# EAGLE board Digital Temperature Sensor Breakout - TMP102-Panel (EAGLE 6.4), part 1 of 3
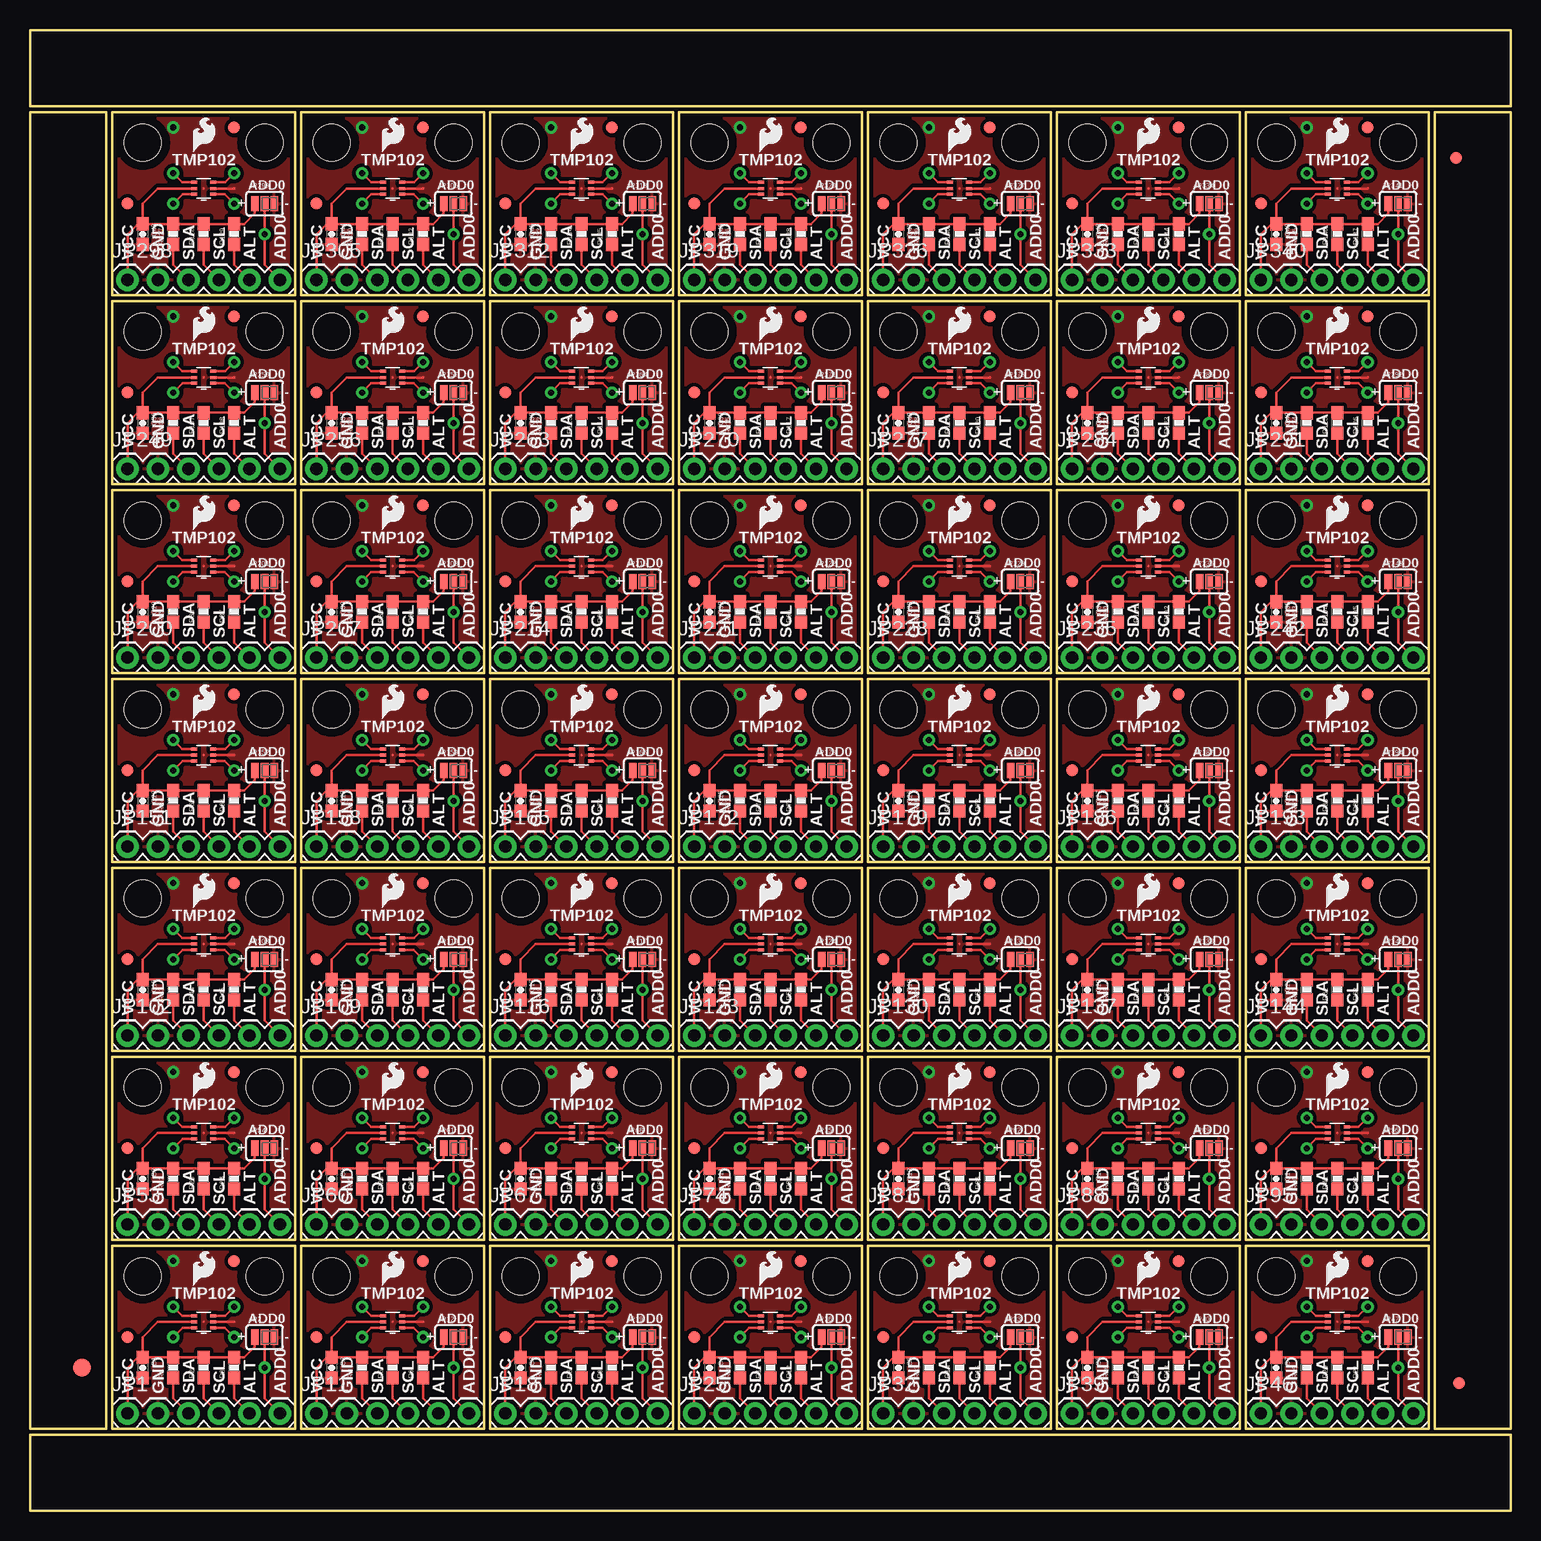
[diagram p0: board, top side]
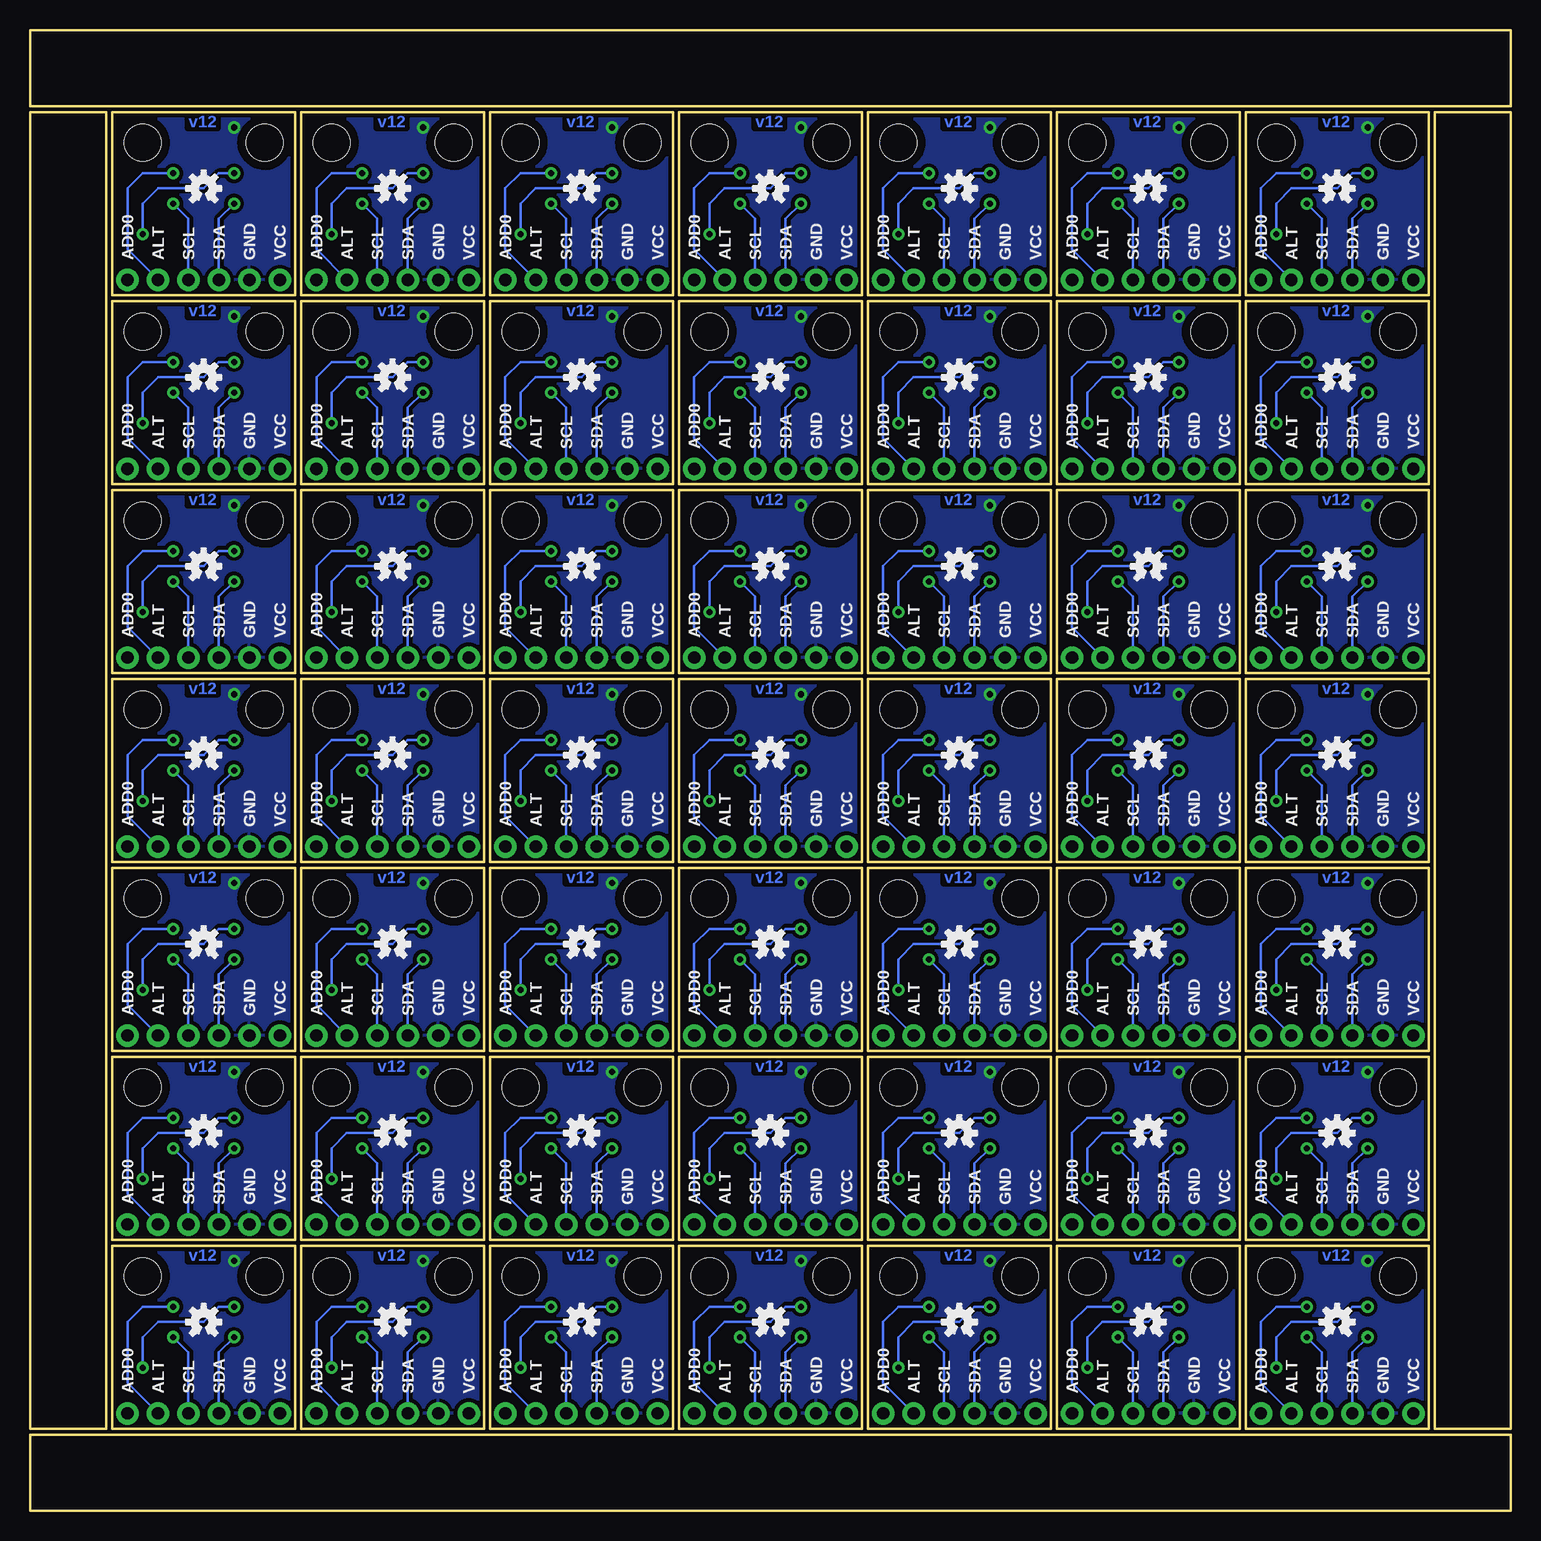
[diagram p1: board, bottom side, seen from below]

Size 123.44 x 123.44 mm. Coordinates in mm from the lower left corner, seen from the top.
Outline: 216 segments
Copper layers (1*16): Top 0.035mm / dielectric 1.5mm / Bottom 0.035mm
Design rules "SparkFun": minimum track width 7mil, minimum drill 15mil, track to track 8mil, track to pad 8mil, pad to pad 8mil, via to via 8mil, smd to smd 8mil, copper to edge 8mil, drill to drill 8mil, minimum pad ring 12mil, minimum via ring 10mil, stop-mask expansion 4mil, vias tented up to drill 20mil, thermal gap 10mil

## Footprints (pad centres in the part's own frame; a part is rotated, then mirrored left to right if it is on the bottom)
0603-CAP = smd 1.1 x 1: 1 -0.85,0; 2 0.85,0
FIDUCIAL-1.5X3 = smd 1.5 x 1.5: 1 0,0
FIDUCIAL-1X2 = smd 1 x 1: 1 0,0
1X06 = drill 1.016 pad 1.88: 1 0,0; 2 2.54,0; 3 5.08,0; 4 7.62,0; 5 10.16,0; 6 12.7,0
SJ_3_PASTE2&3 = smd 0.635 x 1.27: 1 -0.813,0; 2 0,0; 3 0.813,0
STAND-OFF-TIGHT = hole 3.048: 0,0
0603-RES = smd 1.1 x 1: 1 -0.85,0; 2 0.85,0
SOT563-2 = smd 0.508 x 0.249: 1 -0.8,0.498; 2 -0.8,0.003; 3 -0.8,-0.506; 4 0.776,-0.506; 5 0.776,0.003; 6 0.776,0.498

## Placement (x,y rotation side)
C1  0.1uF  [0603-CAP]  9.4,11.94 270 top
C2  0.1uF  [0603-CAP]  25.15,11.94 270 top
C3  0.1uF  [0603-CAP]  40.89,11.94 270 top
C4  0.1uF  [0603-CAP]  56.64,11.94 270 top
C5  0.1uF  [0603-CAP]  72.39,11.94 270 top
C6  0.1uF  [0603-CAP]  88.14,11.94 270 top
C7  0.1uF  [0603-CAP]  103.89,11.94 270 top
C8  0.1uF  [0603-CAP]  9.4,27.69 270 top
C9  0.1uF  [0603-CAP]  25.15,27.69 270 top
C10  0.1uF  [0603-CAP]  40.89,27.69 270 top
C11  0.1uF  [0603-CAP]  56.64,27.69 270 top
C12  0.1uF  [0603-CAP]  72.39,27.69 270 top
C13  0.1uF  [0603-CAP]  88.14,27.69 270 top
C14  0.1uF  [0603-CAP]  103.89,27.69 270 top
C15  0.1uF  [0603-CAP]  9.4,43.43 270 top
C16  0.1uF  [0603-CAP]  25.15,43.43 270 top
C17  0.1uF  [0603-CAP]  40.89,43.43 270 top
C18  0.1uF  [0603-CAP]  56.64,43.43 270 top
C19  0.1uF  [0603-CAP]  72.39,43.43 270 top
C20  0.1uF  [0603-CAP]  88.14,43.43 270 top
C21  0.1uF  [0603-CAP]  103.89,43.43 270 top
C22  0.1uF  [0603-CAP]  9.4,59.18 270 top
C23  0.1uF  [0603-CAP]  25.15,59.18 270 top
C24  0.1uF  [0603-CAP]  40.89,59.18 270 top
C25  0.1uF  [0603-CAP]  56.64,59.18 270 top
C26  0.1uF  [0603-CAP]  72.39,59.18 270 top
C27  0.1uF  [0603-CAP]  88.14,59.18 270 top
C28  0.1uF  [0603-CAP]  103.89,59.18 270 top
C29  0.1uF  [0603-CAP]  9.4,74.93 270 top
C30  0.1uF  [0603-CAP]  25.15,74.93 270 top
C31  0.1uF  [0603-CAP]  40.89,74.93 270 top
C32  0.1uF  [0603-CAP]  56.64,74.93 270 top
C33  0.1uF  [0603-CAP]  72.39,74.93 270 top
C34  0.1uF  [0603-CAP]  88.14,74.93 270 top
C35  0.1uF  [0603-CAP]  103.89,74.93 270 top
C36  0.1uF  [0603-CAP]  9.4,90.68 270 top
C37  0.1uF  [0603-CAP]  25.15,90.68 270 top
C38  0.1uF  [0603-CAP]  40.89,90.68 270 top
C39  0.1uF  [0603-CAP]  56.64,90.68 270 top
C40  0.1uF  [0603-CAP]  72.39,90.68 270 top
C41  0.1uF  [0603-CAP]  88.14,90.68 270 top
C42  0.1uF  [0603-CAP]  103.89,90.68 270 top
C43  0.1uF  [0603-CAP]  9.4,106.43 270 top
C44  0.1uF  [0603-CAP]  25.15,106.43 270 top
C45  0.1uF  [0603-CAP]  40.89,106.43 270 top
C46  0.1uF  [0603-CAP]  56.64,106.43 270 top
C47  0.1uF  [0603-CAP]  72.39,106.43 270 top
C48  0.1uF  [0603-CAP]  88.14,106.43 270 top
C49  0.1uF  [0603-CAP]  103.89,106.43 270 top
E$1  [FIDUCIAL-1.5X3]  4.32,11.94 0 top
E$4  [FIDUCIAL-1X2]  119.13,10.67 0 top
E$5  [FIDUCIAL-1X2]  118.87,112.78 180 top
JP1  [1X06]  8.13,8.13 0 top
JP2  JUMPER-32-3  [SJ_3_PASTE2&3]  19.56,14.48 0 top
JP3  LOGO-SFESK  [SFE-LOGO-FLAME]  13.59,18.8 0 top
JP4  FIDUCIAL1X2  [FIDUCIAL-1X2]  8.13,14.48 0 top
JP5  FIDUCIAL1X2  [FIDUCIAL-1X2]  17.02,20.83 0 top
JP6  STAND-OFFTIGHT  [STAND-OFF-TIGHT]  9.4,19.56 0 top
JP7  STAND-OFFTIGHT  [STAND-OFF-TIGHT]  19.56,19.56 0 top
JP8  LOGO-SFESK  [SFE-LOGO-FLAME]  29.34,18.8 0 top
JP9  FIDUCIAL1X2  [FIDUCIAL-1X2]  23.88,14.48 0 top
JP10  FIDUCIAL1X2  [FIDUCIAL-1X2]  32.77,20.83 0 top
JP11  [1X06]  23.88,8.13 0 top
JP12  JUMPER-32-3  [SJ_3_PASTE2&3]  35.31,14.48 0 top
JP13  STAND-OFFTIGHT  [STAND-OFF-TIGHT]  25.15,19.56 0 top
JP14  STAND-OFFTIGHT  [STAND-OFF-TIGHT]  35.31,19.56 0 top
JP15  LOGO-SFESK  [SFE-LOGO-FLAME]  45.09,18.8 0 top
JP16  FIDUCIAL1X2  [FIDUCIAL-1X2]  39.62,14.48 0 top
JP17  FIDUCIAL1X2  [FIDUCIAL-1X2]  48.51,20.83 0 top
JP18  [1X06]  39.62,8.13 0 top
JP19  JUMPER-32-3  [SJ_3_PASTE2&3]  51.05,14.48 0 top
JP20  STAND-OFFTIGHT  [STAND-OFF-TIGHT]  40.89,19.56 0 top
JP21  STAND-OFFTIGHT  [STAND-OFF-TIGHT]  51.05,19.56 0 top
JP22  LOGO-SFESK  [SFE-LOGO-FLAME]  60.83,18.8 0 top
JP23  FIDUCIAL1X2  [FIDUCIAL-1X2]  55.37,14.48 0 top
JP24  FIDUCIAL1X2  [FIDUCIAL-1X2]  64.26,20.83 0 top
JP25  [1X06]  55.37,8.13 0 top
JP26  JUMPER-32-3  [SJ_3_PASTE2&3]  66.8,14.48 0 top
JP27  STAND-OFFTIGHT  [STAND-OFF-TIGHT]  56.64,19.56 0 top
JP28  STAND-OFFTIGHT  [STAND-OFF-TIGHT]  66.8,19.56 0 top
JP29  LOGO-SFESK  [SFE-LOGO-FLAME]  76.58,18.8 0 top
JP30  FIDUCIAL1X2  [FIDUCIAL-1X2]  71.12,14.48 0 top
JP31  FIDUCIAL1X2  [FIDUCIAL-1X2]  80.01,20.83 0 top
JP32  [1X06]  71.12,8.13 0 top
JP33  JUMPER-32-3  [SJ_3_PASTE2&3]  82.55,14.48 0 top
JP34  STAND-OFFTIGHT  [STAND-OFF-TIGHT]  72.39,19.56 0 top
JP35  STAND-OFFTIGHT  [STAND-OFF-TIGHT]  82.55,19.56 0 top
JP36  LOGO-SFESK  [SFE-LOGO-FLAME]  92.33,18.8 0 top
JP37  FIDUCIAL1X2  [FIDUCIAL-1X2]  86.87,14.48 0 top
JP38  FIDUCIAL1X2  [FIDUCIAL-1X2]  95.76,20.83 0 top
JP39  [1X06]  86.87,8.13 0 top
JP40  JUMPER-32-3  [SJ_3_PASTE2&3]  98.3,14.48 0 top
JP41  STAND-OFFTIGHT  [STAND-OFF-TIGHT]  88.14,19.56 0 top
JP42  STAND-OFFTIGHT  [STAND-OFF-TIGHT]  98.3,19.56 0 top
JP43  LOGO-SFESK  [SFE-LOGO-FLAME]  108.08,18.8 0 top
JP44  FIDUCIAL1X2  [FIDUCIAL-1X2]  102.62,14.48 0 top
JP45  FIDUCIAL1X2  [FIDUCIAL-1X2]  111.51,20.83 0 top
JP46  [1X06]  102.62,8.13 0 top
JP47  JUMPER-32-3  [SJ_3_PASTE2&3]  114.05,14.48 0 top
JP48  STAND-OFFTIGHT  [STAND-OFF-TIGHT]  103.89,19.56 0 top
JP49  STAND-OFFTIGHT  [STAND-OFF-TIGHT]  114.05,19.56 0 top
JP50  LOGO-SFESK  [SFE-LOGO-FLAME]  13.59,34.54 0 top
JP51  FIDUCIAL1X2  [FIDUCIAL-1X2]  8.13,30.23 0 top
JP52  FIDUCIAL1X2  [FIDUCIAL-1X2]  17.02,36.58 0 top
JP53  [1X06]  8.13,23.88 0 top
JP54  JUMPER-32-3  [SJ_3_PASTE2&3]  19.56,30.23 0 top
JP55  STAND-OFFTIGHT  [STAND-OFF-TIGHT]  9.4,35.31 0 top
JP56  STAND-OFFTIGHT  [STAND-OFF-TIGHT]  19.56,35.31 0 top
JP57  LOGO-SFESK  [SFE-LOGO-FLAME]  29.34,34.54 0 top
JP58  FIDUCIAL1X2  [FIDUCIAL-1X2]  23.88,30.23 0 top
JP59  FIDUCIAL1X2  [FIDUCIAL-1X2]  32.77,36.58 0 top
JP60  [1X06]  23.88,23.88 0 top
JP61  JUMPER-32-3  [SJ_3_PASTE2&3]  35.31,30.23 0 top
JP62  STAND-OFFTIGHT  [STAND-OFF-TIGHT]  25.15,35.31 0 top
JP63  STAND-OFFTIGHT  [STAND-OFF-TIGHT]  35.31,35.31 0 top
JP64  LOGO-SFESK  [SFE-LOGO-FLAME]  45.09,34.54 0 top
JP65  FIDUCIAL1X2  [FIDUCIAL-1X2]  39.62,30.23 0 top
JP66  FIDUCIAL1X2  [FIDUCIAL-1X2]  48.51,36.58 0 top
JP67  [1X06]  39.62,23.88 0 top
JP68  JUMPER-32-3  [SJ_3_PASTE2&3]  51.05,30.23 0 top
JP69  STAND-OFFTIGHT  [STAND-OFF-TIGHT]  40.89,35.31 0 top
JP70  STAND-OFFTIGHT  [STAND-OFF-TIGHT]  51.05,35.31 0 top
JP71  LOGO-SFESK  [SFE-LOGO-FLAME]  60.83,34.54 0 top
JP72  FIDUCIAL1X2  [FIDUCIAL-1X2]  55.37,30.23 0 top
JP73  FIDUCIAL1X2  [FIDUCIAL-1X2]  64.26,36.58 0 top
JP74  [1X06]  55.37,23.88 0 top
JP75  JUMPER-32-3  [SJ_3_PASTE2&3]  66.8,30.23 0 top
JP76  STAND-OFFTIGHT  [STAND-OFF-TIGHT]  56.64,35.31 0 top
JP77  STAND-OFFTIGHT  [STAND-OFF-TIGHT]  66.8,35.31 0 top
JP78  LOGO-SFESK  [SFE-LOGO-FLAME]  76.58,34.54 0 top
JP79  FIDUCIAL1X2  [FIDUCIAL-1X2]  71.12,30.23 0 top
JP80  FIDUCIAL1X2  [FIDUCIAL-1X2]  80.01,36.58 0 top
JP81  [1X06]  71.12,23.88 0 top
JP82  JUMPER-32-3  [SJ_3_PASTE2&3]  82.55,30.23 0 top
JP83  STAND-OFFTIGHT  [STAND-OFF-TIGHT]  72.39,35.31 0 top
JP84  STAND-OFFTIGHT  [STAND-OFF-TIGHT]  82.55,35.31 0 top
JP85  LOGO-SFESK  [SFE-LOGO-FLAME]  92.33,34.54 0 top
JP86  FIDUCIAL1X2  [FIDUCIAL-1X2]  86.87,30.23 0 top
JP87  FIDUCIAL1X2  [FIDUCIAL-1X2]  95.76,36.58 0 top
JP88  [1X06]  86.87,23.88 0 top
JP89  JUMPER-32-3  [SJ_3_PASTE2&3]  98.3,30.23 0 top
JP90  STAND-OFFTIGHT  [STAND-OFF-TIGHT]  88.14,35.31 0 top
JP91  STAND-OFFTIGHT  [STAND-OFF-TIGHT]  98.3,35.31 0 top
JP92  LOGO-SFESK  [SFE-LOGO-FLAME]  108.08,34.54 0 top
JP93  FIDUCIAL1X2  [FIDUCIAL-1X2]  102.62,30.23 0 top
JP94  FIDUCIAL1X2  [FIDUCIAL-1X2]  111.51,36.58 0 top
JP95  [1X06]  102.62,23.88 0 top
JP96  JUMPER-32-3  [SJ_3_PASTE2&3]  114.05,30.23 0 top
JP97  STAND-OFFTIGHT  [STAND-OFF-TIGHT]  103.89,35.31 0 top
JP98  STAND-OFFTIGHT  [STAND-OFF-TIGHT]  114.05,35.31 0 top
JP99  LOGO-SFESK  [SFE-LOGO-FLAME]  13.59,50.29 0 top
JP100  FIDUCIAL1X2  [FIDUCIAL-1X2]  8.13,45.97 0 top
JP101  FIDUCIAL1X2  [FIDUCIAL-1X2]  17.02,52.32 0 top
JP102  [1X06]  8.13,39.62 0 top
JP103  JUMPER-32-3  [SJ_3_PASTE2&3]  19.56,45.97 0 top
JP104  STAND-OFFTIGHT  [STAND-OFF-TIGHT]  9.4,51.05 0 top
JP105  STAND-OFFTIGHT  [STAND-OFF-TIGHT]  19.56,51.05 0 top
JP106  LOGO-SFESK  [SFE-LOGO-FLAME]  29.34,50.29 0 top
JP107  FIDUCIAL1X2  [FIDUCIAL-1X2]  23.88,45.97 0 top
JP108  FIDUCIAL1X2  [FIDUCIAL-1X2]  32.77,52.32 0 top
JP109  [1X06]  23.88,39.62 0 top
JP110  JUMPER-32-3  [SJ_3_PASTE2&3]  35.31,45.97 0 top
JP111  STAND-OFFTIGHT  [STAND-OFF-TIGHT]  25.15,51.05 0 top
JP112  STAND-OFFTIGHT  [STAND-OFF-TIGHT]  35.31,51.05 0 top
JP113  LOGO-SFESK  [SFE-LOGO-FLAME]  45.09,50.29 0 top
JP114  FIDUCIAL1X2  [FIDUCIAL-1X2]  39.62,45.97 0 top
JP115  FIDUCIAL1X2  [FIDUCIAL-1X2]  48.51,52.32 0 top
JP116  [1X06]  39.62,39.62 0 top
JP117  JUMPER-32-3  [SJ_3_PASTE2&3]  51.05,45.97 0 top
JP118  STAND-OFFTIGHT  [STAND-OFF-TIGHT]  40.89,51.05 0 top
JP119  STAND-OFFTIGHT  [STAND-OFF-TIGHT]  51.05,51.05 0 top
JP120  LOGO-SFESK  [SFE-LOGO-FLAME]  60.83,50.29 0 top
JP121  FIDUCIAL1X2  [FIDUCIAL-1X2]  55.37,45.97 0 top
JP122  FIDUCIAL1X2  [FIDUCIAL-1X2]  64.26,52.32 0 top
JP123  [1X06]  55.37,39.62 0 top
JP124  JUMPER-32-3  [SJ_3_PASTE2&3]  66.8,45.97 0 top
JP125  STAND-OFFTIGHT  [STAND-OFF-TIGHT]  56.64,51.05 0 top
JP126  STAND-OFFTIGHT  [STAND-OFF-TIGHT]  66.8,51.05 0 top
JP127  LOGO-SFESK  [SFE-LOGO-FLAME]  76.58,50.29 0 top
JP128  FIDUCIAL1X2  [FIDUCIAL-1X2]  71.12,45.97 0 top
JP129  FIDUCIAL1X2  [FIDUCIAL-1X2]  80.01,52.32 0 top
JP130  [1X06]  71.12,39.62 0 top
JP131  JUMPER-32-3  [SJ_3_PASTE2&3]  82.55,45.97 0 top
JP132  STAND-OFFTIGHT  [STAND-OFF-TIGHT]  72.39,51.05 0 top
JP133  STAND-OFFTIGHT  [STAND-OFF-TIGHT]  82.55,51.05 0 top
JP134  LOGO-SFESK  [SFE-LOGO-FLAME]  92.33,50.29 0 top
JP135  FIDUCIAL1X2  [FIDUCIAL-1X2]  86.87,45.97 0 top
JP136  FIDUCIAL1X2  [FIDUCIAL-1X2]  95.76,52.32 0 top
JP137  [1X06]  86.87,39.62 0 top
JP138  JUMPER-32-3  [SJ_3_PASTE2&3]  98.3,45.97 0 top
JP139  STAND-OFFTIGHT  [STAND-OFF-TIGHT]  88.14,51.05 0 top
JP140  STAND-OFFTIGHT  [STAND-OFF-TIGHT]  98.3,51.05 0 top
JP141  LOGO-SFESK  [SFE-LOGO-FLAME]  108.08,50.29 0 top
JP142  FIDUCIAL1X2  [FIDUCIAL-1X2]  102.62,45.97 0 top
JP143  FIDUCIAL1X2  [FIDUCIAL-1X2]  111.51,52.32 0 top
JP144  [1X06]  102.62,39.62 0 top
JP145  JUMPER-32-3  [SJ_3_PASTE2&3]  114.05,45.97 0 top
JP146  STAND-OFFTIGHT  [STAND-OFF-TIGHT]  103.89,51.05 0 top
JP147  STAND-OFFTIGHT  [STAND-OFF-TIGHT]  114.05,51.05 0 top
JP148  LOGO-SFESK  [SFE-LOGO-FLAME]  13.59,66.04 0 top
JP149  FIDUCIAL1X2  [FIDUCIAL-1X2]  8.13,61.72 0 top
JP150  FIDUCIAL1X2  [FIDUCIAL-1X2]  17.02,68.07 0 top
JP151  [1X06]  8.13,55.37 0 top
JP152  JUMPER-32-3  [SJ_3_PASTE2&3]  19.56,61.72 0 top
JP153  STAND-OFFTIGHT  [STAND-OFF-TIGHT]  9.4,66.8 0 top
JP154  STAND-OFFTIGHT  [STAND-OFF-TIGHT]  19.56,66.8 0 top
JP155  LOGO-SFESK  [SFE-LOGO-FLAME]  29.34,66.04 0 top
JP156  FIDUCIAL1X2  [FIDUCIAL-1X2]  23.88,61.72 0 top
JP157  FIDUCIAL1X2  [FIDUCIAL-1X2]  32.77,68.07 0 top
JP158  [1X06]  23.88,55.37 0 top
JP159  JUMPER-32-3  [SJ_3_PASTE2&3]  35.31,61.72 0 top
JP160  STAND-OFFTIGHT  [STAND-OFF-TIGHT]  25.15,66.8 0 top
JP161  STAND-OFFTIGHT  [STAND-OFF-TIGHT]  35.31,66.8 0 top
JP162  LOGO-SFESK  [SFE-LOGO-FLAME]  45.09,66.04 0 top
JP163  FIDUCIAL1X2  [FIDUCIAL-1X2]  39.62,61.72 0 top
JP164  FIDUCIAL1X2  [FIDUCIAL-1X2]  48.51,68.07 0 top
JP165  [1X06]  39.62,55.37 0 top
JP166  JUMPER-32-3  [SJ_3_PASTE2&3]  51.05,61.72 0 top
JP167  STAND-OFFTIGHT  [STAND-OFF-TIGHT]  40.89,66.8 0 top
JP168  STAND-OFFTIGHT  [STAND-OFF-TIGHT]  51.05,66.8 0 top
JP169  LOGO-SFESK  [SFE-LOGO-FLAME]  60.83,66.04 0 top
JP170  FIDUCIAL1X2  [FIDUCIAL-1X2]  55.37,61.72 0 top
JP171  FIDUCIAL1X2  [FIDUCIAL-1X2]  64.26,68.07 0 top
JP172  [1X06]  55.37,55.37 0 top
JP173  JUMPER-32-3  [SJ_3_PASTE2&3]  66.8,61.72 0 top
JP174  STAND-OFFTIGHT  [STAND-OFF-TIGHT]  56.64,66.8 0 top
JP175  STAND-OFFTIGHT  [STAND-OFF-TIGHT]  66.8,66.8 0 top
JP176  LOGO-SFESK  [SFE-LOGO-FLAME]  76.58,66.04 0 top
JP177  FIDUCIAL1X2  [FIDUCIAL-1X2]  71.12,61.72 0 top
JP178  FIDUCIAL1X2  [FIDUCIAL-1X2]  80.01,68.07 0 top
JP179  [1X06]  71.12,55.37 0 top
JP180  JUMPER-32-3  [SJ_3_PASTE2&3]  82.55,61.72 0 top
JP181  STAND-OFFTIGHT  [STAND-OFF-TIGHT]  72.39,66.8 0 top
JP182  STAND-OFFTIGHT  [STAND-OFF-TIGHT]  82.55,66.8 0 top
JP183  LOGO-SFESK  [SFE-LOGO-FLAME]  92.33,66.04 0 top
JP184  FIDUCIAL1X2  [FIDUCIAL-1X2]  86.87,61.72 0 top
JP185  FIDUCIAL1X2  [FIDUCIAL-1X2]  95.76,68.07 0 top
JP186  [1X06]  86.87,55.37 0 top
JP187  JUMPER-32-3  [SJ_3_PASTE2&3]  98.3,61.72 0 top
JP188  STAND-OFFTIGHT  [STAND-OFF-TIGHT]  88.14,66.8 0 top
JP189  STAND-OFFTIGHT  [STAND-OFF-TIGHT]  98.3,66.8 0 top
JP190  LOGO-SFESK  [SFE-LOGO-FLAME]  108.08,66.04 0 top
JP191  FIDUCIAL1X2  [FIDUCIAL-1X2]  102.62,61.72 0 top
JP192  FIDUCIAL1X2  [FIDUCIAL-1X2]  111.51,68.07 0 top
JP193  [1X06]  102.62,55.37 0 top
JP194  JUMPER-32-3  [SJ_3_PASTE2&3]  114.05,61.72 0 top
JP195  STAND-OFFTIGHT  [STAND-OFF-TIGHT]  103.89,66.8 0 top
JP196  STAND-OFFTIGHT  [STAND-OFF-TIGHT]  114.05,66.8 0 top
JP197  LOGO-SFESK  [SFE-LOGO-FLAME]  13.59,81.79 0 top
JP198  FIDUCIAL1X2  [FIDUCIAL-1X2]  8.13,77.47 0 top
JP199  FIDUCIAL1X2  [FIDUCIAL-1X2]  17.02,83.82 0 top
JP200  [1X06]  8.13,71.12 0 top
JP201  JUMPER-32-3  [SJ_3_PASTE2&3]  19.56,77.47 0 top
JP202  STAND-OFFTIGHT  [STAND-OFF-TIGHT]  9.4,82.55 0 top
JP203  STAND-OFFTIGHT  [STAND-OFF-TIGHT]  19.56,82.55 0 top
JP204  LOGO-SFESK  [SFE-LOGO-FLAME]  29.34,81.79 0 top
JP205  FIDUCIAL1X2  [FIDUCIAL-1X2]  23.88,77.47 0 top
JP206  FIDUCIAL1X2  [FIDUCIAL-1X2]  32.77,83.82 0 top
JP207  [1X06]  23.88,71.12 0 top
JP208  JUMPER-32-3  [SJ_3_PASTE2&3]  35.31,77.47 0 top
JP209  STAND-OFFTIGHT  [STAND-OFF-TIGHT]  25.15,82.55 0 top
JP210  STAND-OFFTIGHT  [STAND-OFF-TIGHT]  35.31,82.55 0 top
JP211  LOGO-SFESK  [SFE-LOGO-FLAME]  45.09,81.79 0 top
JP212  FIDUCIAL1X2  [FIDUCIAL-1X2]  39.62,77.47 0 top
JP213  FIDUCIAL1X2  [FIDUCIAL-1X2]  48.51,83.82 0 top
JP214  [1X06]  39.62,71.12 0 top
JP215  JUMPER-32-3  [SJ_3_PASTE2&3]  51.05,77.47 0 top
JP216  STAND-OFFTIGHT  [STAND-OFF-TIGHT]  40.89,82.55 0 top
JP217  STAND-OFFTIGHT  [STAND-OFF-TIGHT]  51.05,82.55 0 top
JP218  LOGO-SFESK  [SFE-LOGO-FLAME]  60.83,81.79 0 top
JP219  FIDUCIAL1X2  [FIDUCIAL-1X2]  55.37,77.47 0 top
JP220  FIDUCIAL1X2  [FIDUCIAL-1X2]  64.26,83.82 0 top
JP221  [1X06]  55.37,71.12 0 top
JP222  JUMPER-32-3  [SJ_3_PASTE2&3]  66.8,77.47 0 top
JP223  STAND-OFFTIGHT  [STAND-OFF-TIGHT]  56.64,82.55 0 top
JP224  STAND-OFFTIGHT  [STAND-OFF-TIGHT]  66.8,82.55 0 top
JP225  LOGO-SFESK  [SFE-LOGO-FLAME]  76.58,81.79 0 top
JP226  FIDUCIAL1X2  [FIDUCIAL-1X2]  71.12,77.47 0 top
JP227  FIDUCIAL1X2  [FIDUCIAL-1X2]  80.01,83.82 0 top
JP228  [1X06]  71.12,71.12 0 top
JP229  JUMPER-32-3  [SJ_3_PASTE2&3]  82.55,77.47 0 top
JP230  STAND-OFFTIGHT  [STAND-OFF-TIGHT]  72.39,82.55 0 top
JP231  STAND-OFFTIGHT  [STAND-OFF-TIGHT]  82.55,82.55 0 top
JP232  LOGO-SFESK  [SFE-LOGO-FLAME]  92.33,81.79 0 top
JP233  FIDUCIAL1X2  [FIDUCIAL-1X2]  86.87,77.47 0 top
JP234  FIDUCIAL1X2  [FIDUCIAL-1X2]  95.76,83.82 0 top
JP235  [1X06]  86.87,71.12 0 top
JP236  JUMPER-32-3  [SJ_3_PASTE2&3]  98.3,77.47 0 top
JP237  STAND-OFFTIGHT  [STAND-OFF-TIGHT]  88.14,82.55 0 top
JP238  STAND-OFFTIGHT  [STAND-OFF-TIGHT]  98.3,82.55 0 top
JP239  LOGO-SFESK  [SFE-LOGO-FLAME]  108.08,81.79 0 top
JP240  FIDUCIAL1X2  [FIDUCIAL-1X2]  102.62,77.47 0 top
JP241  FIDUCIAL1X2  [FIDUCIAL-1X2]  111.51,83.82 0 top
JP242  [1X06]  102.62,71.12 0 top
JP243  JUMPER-32-3  [SJ_3_PASTE2&3]  114.05,77.47 0 top
JP244  STAND-OFFTIGHT  [STAND-OFF-TIGHT]  103.89,82.55 0 top
JP245  STAND-OFFTIGHT  [STAND-OFF-TIGHT]  114.05,82.55 0 top
JP246  LOGO-SFESK  [SFE-LOGO-FLAME]  13.59,97.54 0 top
JP247  FIDUCIAL1X2  [FIDUCIAL-1X2]  8.13,93.22 0 top
JP248  FIDUCIAL1X2  [FIDUCIAL-1X2]  17.02,99.57 0 top
JP249  [1X06]  8.13,86.87 0 top
JP250  JUMPER-32-3  [SJ_3_PASTE2&3]  19.56,93.22 0 top
JP251  STAND-OFFTIGHT  [STAND-OFF-TIGHT]  9.4,98.3 0 top
JP252  STAND-OFFTIGHT  [STAND-OFF-TIGHT]  19.56,98.3 0 top
JP253  LOGO-SFESK  [SFE-LOGO-FLAME]  29.34,97.54 0 top
JP254  FIDUCIAL1X2  [FIDUCIAL-1X2]  23.88,93.22 0 top
JP255  FIDUCIAL1X2  [FIDUCIAL-1X2]  32.77,99.57 0 top
JP256  [1X06]  23.88,86.87 0 top
JP257  JUMPER-32-3  [SJ_3_PASTE2&3]  35.31,93.22 0 top
JP258  STAND-OFFTIGHT  [STAND-OFF-TIGHT]  25.15,98.3 0 top
JP259  STAND-OFFTIGHT  [STAND-OFF-TIGHT]  35.31,98.3 0 top
JP260  LOGO-SFESK  [SFE-LOGO-FLAME]  45.09,97.54 0 top
JP261  FIDUCIAL1X2  [FIDUCIAL-1X2]  39.62,93.22 0 top
JP262  FIDUCIAL1X2  [FIDUCIAL-1X2]  48.51,99.57 0 top
JP263  [1X06]  39.62,86.87 0 top
JP264  JUMPER-32-3  [SJ_3_PASTE2&3]  51.05,93.22 0 top
JP265  STAND-OFFTIGHT  [STAND-OFF-TIGHT]  40.89,98.3 0 top
JP266  STAND-OFFTIGHT  [STAND-OFF-TIGHT]  51.05,98.3 0 top
JP267  LOGO-SFESK  [SFE-LOGO-FLAME]  60.83,97.54 0 top
JP268  FIDUCIAL1X2  [FIDUCIAL-1X2]  55.37,93.22 0 top
JP269  FIDUCIAL1X2  [FIDUCIAL-1X2]  64.26,99.57 0 top
JP270  [1X06]  55.37,86.87 0 top
JP271  JUMPER-32-3  [SJ_3_PASTE2&3]  66.8,93.22 0 top
JP272  STAND-OFFTIGHT  [STAND-OFF-TIGHT]  56.64,98.3 0 top
JP273  STAND-OFFTIGHT  [STAND-OFF-TIGHT]  66.8,98.3 0 top
JP274  LOGO-SFESK  [SFE-LOGO-FLAME]  76.58,97.54 0 top
JP275  FIDUCIAL1X2  [FIDUCIAL-1X2]  71.12,93.22 0 top
JP276  FIDUCIAL1X2  [FIDUCIAL-1X2]  80.01,99.57 0 top
JP277  [1X06]  71.12,86.87 0 top
JP278  JUMPER-32-3  [SJ_3_PASTE2&3]  82.55,93.22 0 top
JP279  STAND-OFFTIGHT  [STAND-OFF-TIGHT]  72.39,98.3 0 top
JP280  STAND-OFFTIGHT  [STAND-OFF-TIGHT]  82.55,98.3 0 top
JP281  LOGO-SFESK  [SFE-LOGO-FLAME]  92.33,97.54 0 top
JP282  FIDUCIAL1X2  [FIDUCIAL-1X2]  86.87,93.22 0 top
JP283  FIDUCIAL1X2  [FIDUCIAL-1X2]  95.76,99.57 0 top
JP284  [1X06]  86.87,86.87 0 top
JP285  JUMPER-32-3  [SJ_3_PASTE2&3]  98.3,93.22 0 top
JP286  STAND-OFFTIGHT  [STAND-OFF-TIGHT]  88.14,98.3 0 top
JP287  STAND-OFFTIGHT  [STAND-OFF-TIGHT]  98.3,98.3 0 top
JP288  LOGO-SFESK  [SFE-LOGO-FLAME]  108.08,97.54 0 top
JP289  FIDUCIAL1X2  [FIDUCIAL-1X2]  102.62,93.22 0 top
JP290  FIDUCIAL1X2  [FIDUCIAL-1X2]  111.51,99.57 0 top
JP291  [1X06]  102.62,86.87 0 top
JP292  JUMPER-32-3  [SJ_3_PASTE2&3]  114.05,93.22 0 top
JP293  STAND-OFFTIGHT  [STAND-OFF-TIGHT]  103.89,98.3 0 top
JP294  STAND-OFFTIGHT  [STAND-OFF-TIGHT]  114.05,98.3 0 top
JP295  LOGO-SFESK  [SFE-LOGO-FLAME]  13.59,113.28 0 top
JP296  FIDUCIAL1X2  [FIDUCIAL-1X2]  8.13,108.97 0 top
JP297  FIDUCIAL1X2  [FIDUCIAL-1X2]  17.02,115.32 0 top
JP298  [1X06]  8.13,102.62 0 top
JP299  JUMPER-32-3  [SJ_3_PASTE2&3]  19.56,108.97 0 top
JP300  STAND-OFFTIGHT  [STAND-OFF-TIGHT]  9.4,114.05 0 top
JP301  STAND-OFFTIGHT  [STAND-OFF-TIGHT]  19.56,114.05 0 top
JP302  LOGO-SFESK  [SFE-LOGO-FLAME]  29.34,113.28 0 top
JP303  FIDUCIAL1X2  [FIDUCIAL-1X2]  23.88,108.97 0 top
JP304  FIDUCIAL1X2  [FIDUCIAL-1X2]  32.77,115.32 0 top
JP305  [1X06]  23.88,102.62 0 top
JP306  JUMPER-32-3  [SJ_3_PASTE2&3]  35.31,108.97 0 top
JP307  STAND-OFFTIGHT  [STAND-OFF-TIGHT]  25.15,114.05 0 top
JP308  STAND-OFFTIGHT  [STAND-OFF-TIGHT]  35.31,114.05 0 top
JP309  LOGO-SFESK  [SFE-LOGO-FLAME]  45.09,113.28 0 top
JP310  FIDUCIAL1X2  [FIDUCIAL-1X2]  39.62,108.97 0 top
JP311  FIDUCIAL1X2  [FIDUCIAL-1X2]  48.51,115.32 0 top
JP312  [1X06]  39.62,102.62 0 top
JP313  JUMPER-32-3  [SJ_3_PASTE2&3]  51.05,108.97 0 top
JP314  STAND-OFFTIGHT  [STAND-OFF-TIGHT]  40.89,114.05 0 top
JP315  STAND-OFFTIGHT  [STAND-OFF-TIGHT]  51.05,114.05 0 top
JP316  LOGO-SFESK  [SFE-LOGO-FLAME]  60.83,113.28 0 top
JP317  FIDUCIAL1X2  [FIDUCIAL-1X2]  55.37,108.97 0 top
JP318  FIDUCIAL1X2  [FIDUCIAL-1X2]  64.26,115.32 0 top
JP319  [1X06]  55.37,102.62 0 top
JP320  JUMPER-32-3  [SJ_3_PASTE2&3]  66.8,108.97 0 top
JP321  STAND-OFFTIGHT  [STAND-OFF-TIGHT]  56.64,114.05 0 top
JP322  STAND-OFFTIGHT  [STAND-OFF-TIGHT]  66.8,114.05 0 top
JP323  LOGO-SFESK  [SFE-LOGO-FLAME]  76.58,113.28 0 top
JP324  FIDUCIAL1X2  [FIDUCIAL-1X2]  71.12,108.97 0 top
JP325  FIDUCIAL1X2  [FIDUCIAL-1X2]  80.01,115.32 0 top
JP326  [1X06]  71.12,102.62 0 top
JP327  JUMPER-32-3  [SJ_3_PASTE2&3]  82.55,108.97 0 top
JP328  STAND-OFFTIGHT  [STAND-OFF-TIGHT]  72.39,114.05 0 top
JP329  STAND-OFFTIGHT  [STAND-OFF-TIGHT]  82.55,114.05 0 top
JP330  LOGO-SFESK  [SFE-LOGO-FLAME]  92.33,113.28 0 top
JP331  FIDUCIAL1X2  [FIDUCIAL-1X2]  86.87,108.97 0 top
JP332  FIDUCIAL1X2  [FIDUCIAL-1X2]  95.76,115.32 0 top
JP333  [1X06]  86.87,102.62 0 top
JP334  JUMPER-32-3  [SJ_3_PASTE2&3]  98.3,108.97 0 top
JP335  STAND-OFFTIGHT  [STAND-OFF-TIGHT]  88.14,114.05 0 top
JP336  STAND-OFFTIGHT  [STAND-OFF-TIGHT]  98.3,114.05 0 top
JP337  LOGO-SFESK  [SFE-LOGO-FLAME]  108.08,113.28 0 top
JP338  FIDUCIAL1X2  [FIDUCIAL-1X2]  102.62,108.97 0 top
JP339  FIDUCIAL1X2  [FIDUCIAL-1X2]  111.51,115.32 0 top
JP340  [1X06]  102.62,102.62 0 top
JP341  JUMPER-32-3  [SJ_3_PASTE2&3]  114.05,108.97 0 top
JP342  STAND-OFFTIGHT  [STAND-OFF-TIGHT]  103.89,114.05 0 top
JP343  STAND-OFFTIGHT  [STAND-OFF-TIGHT]  114.05,114.05 0 top
R1  1K  [0603-RES]  11.94,11.94 90 top
R2  1K  [0603-RES]  14.48,11.94 90 top
R3  1K  [0603-RES]  17.02,11.94 90 top
R4  1K  [0603-RES]  27.69,11.94 90 top
R5  1K  [0603-RES]  30.23,11.94 90 top
R6  1K  [0603-RES]  32.77,11.94 90 top
R7  1K  [0603-RES]  43.43,11.94 90 top
R8  1K  [0603-RES]  45.97,11.94 90 top
R9  1K  [0603-RES]  48.51,11.94 90 top
R10  1K  [0603-RES]  59.18,11.94 90 top
R11  1K  [0603-RES]  61.72,11.94 90 top
R12  1K  [0603-RES]  64.26,11.94 90 top
R13  1K  [0603-RES]  74.93,11.94 90 top
R14  1K  [0603-RES]  77.47,11.94 90 top
R15  1K  [0603-RES]  80.01,11.94 90 top
R16  1K  [0603-RES]  90.68,11.94 90 top
R17  1K  [0603-RES]  93.22,11.94 90 top
R18  1K  [0603-RES]  95.76,11.94 90 top
R19  1K  [0603-RES]  106.43,11.94 90 top
R20  1K  [0603-RES]  108.97,11.94 90 top
R21  1K  [0603-RES]  111.51,11.94 90 top
R22  1K  [0603-RES]  11.94,27.69 90 top
R23  1K  [0603-RES]  14.48,27.69 90 top
R24  1K  [0603-RES]  17.02,27.69 90 top
R25  1K  [0603-RES]  27.69,27.69 90 top
R26  1K  [0603-RES]  30.23,27.69 90 top
R27  1K  [0603-RES]  32.77,27.69 90 top
R28  1K  [0603-RES]  43.43,27.69 90 top
R29  1K  [0603-RES]  45.97,27.69 90 top
R30  1K  [0603-RES]  48.51,27.69 90 top
R31  1K  [0603-RES]  59.18,27.69 90 top
R32  1K  [0603-RES]  61.72,27.69 90 top
R33  1K  [0603-RES]  64.26,27.69 90 top
R34  1K  [0603-RES]  74.93,27.69 90 top
R35  1K  [0603-RES]  77.47,27.69 90 top
R36  1K  [0603-RES]  80.01,27.69 90 top
R37  1K  [0603-RES]  90.68,27.69 90 top
R38  1K  [0603-RES]  93.22,27.69 90 top
R39  1K  [0603-RES]  95.76,27.69 90 top
R40  1K  [0603-RES]  106.43,27.69 90 top
R41  1K  [0603-RES]  108.97,27.69 90 top
R42  1K  [0603-RES]  111.51,27.69 90 top
R43  1K  [0603-RES]  11.94,43.43 90 top
R44  1K  [0603-RES]  14.48,43.43 90 top
R45  1K  [0603-RES]  17.02,43.43 90 top
R46  1K  [0603-RES]  27.69,43.43 90 top
R47  1K  [0603-RES]  30.23,43.43 90 top
R48  1K  [0603-RES]  32.77,43.43 90 top
R49  1K  [0603-RES]  43.43,43.43 90 top
R50  1K  [0603-RES]  45.97,43.43 90 top
R51  1K  [0603-RES]  48.51,43.43 90 top
R52  1K  [0603-RES]  59.18,43.43 90 top
R53  1K  [0603-RES]  61.72,43.43 90 top
R54  1K  [0603-RES]  64.26,43.43 90 top
R55  1K  [0603-RES]  74.93,43.43 90 top
R56  1K  [0603-RES]  77.47,43.43 90 top
R57  1K  [0603-RES]  80.01,43.43 90 top
R58  1K  [0603-RES]  90.68,43.43 90 top
R59  1K  [0603-RES]  93.22,43.43 90 top
R60  1K  [0603-RES]  95.76,43.43 90 top
R61  1K  [0603-RES]  106.43,43.43 90 top
R62  1K  [0603-RES]  108.97,43.43 90 top
R63  1K  [0603-RES]  111.51,43.43 90 top
R64  1K  [0603-RES]  11.94,59.18 90 top
R65  1K  [0603-RES]  14.48,59.18 90 top
R66  1K  [0603-RES]  17.02,59.18 90 top
R67  1K  [0603-RES]  27.69,59.18 90 top
R68  1K  [0603-RES]  30.23,59.18 90 top
R69  1K  [0603-RES]  32.77,59.18 90 top
R70  1K  [0603-RES]  43.43,59.18 90 top
R71  1K  [0603-RES]  45.97,59.18 90 top
R72  1K  [0603-RES]  48.51,59.18 90 top
R73  1K  [0603-RES]  59.18,59.18 90 top
R74  1K  [0603-RES]  61.72,59.18 90 top
R75  1K  [0603-RES]  64.26,59.18 90 top
R76  1K  [0603-RES]  74.93,59.18 90 top
R77  1K  [0603-RES]  77.47,59.18 90 top
R78  1K  [0603-RES]  80.01,59.18 90 top
R79  1K  [0603-RES]  90.68,59.18 90 top
R80  1K  [0603-RES]  93.22,59.18 90 top
R81  1K  [0603-RES]  95.76,59.18 90 top
R82  1K  [0603-RES]  106.43,59.18 90 top
R83  1K  [0603-RES]  108.97,59.18 90 top
R84  1K  [0603-RES]  111.51,59.18 90 top
R85  1K  [0603-RES]  11.94,74.93 90 top
R86  1K  [0603-RES]  14.48,74.93 90 top
R87  1K  [0603-RES]  17.02,74.93 90 top
R88  1K  [0603-RES]  27.69,74.93 90 top
R89  1K  [0603-RES]  30.23,74.93 90 top
R90  1K  [0603-RES]  32.77,74.93 90 top
R91  1K  [0603-RES]  43.43,74.93 90 top
R92  1K  [0603-RES]  45.97,74.93 90 top
R93  1K  [0603-RES]  48.51,74.93 90 top
R94  1K  [0603-RES]  59.18,74.93 90 top
R95  1K  [0603-RES]  61.72,74.93 90 top
R96  1K  [0603-RES]  64.26,74.93 90 top
R97  1K  [0603-RES]  74.93,74.93 90 top
R98  1K  [0603-RES]  77.47,74.93 90 top
R99  1K  [0603-RES]  80.01,74.93 90 top
R100  1K  [0603-RES]  90.68,74.93 90 top
R101  1K  [0603-RES]  93.22,74.93 90 top
R102  1K  [0603-RES]  95.76,74.93 90 top
R103  1K  [0603-RES]  106.43,74.93 90 top
R104  1K  [0603-RES]  108.97,74.93 90 top
R105  1K  [0603-RES]  111.51,74.93 90 top
R106  1K  [0603-RES]  11.94,90.68 90 top
R107  1K  [0603-RES]  14.48,90.68 90 top
R108  1K  [0603-RES]  17.02,90.68 90 top
R109  1K  [0603-RES]  27.69,90.68 90 top
R110  1K  [0603-RES]  30.23,90.68 90 top
R111  1K  [0603-RES]  32.77,90.68 90 top
R112  1K  [0603-RES]  43.43,90.68 90 top
R113  1K  [0603-RES]  45.97,90.68 90 top
R114  1K  [0603-RES]  48.51,90.68 90 top
R115  1K  [0603-RES]  59.18,90.68 90 top
R116  1K  [0603-RES]  61.72,90.68 90 top
R117  1K  [0603-RES]  64.26,90.68 90 top
R118  1K  [0603-RES]  74.93,90.68 90 top
R119  1K  [0603-RES]  77.47,90.68 90 top
R120  1K  [0603-RES]  80.01,90.68 90 top
R121  1K  [0603-RES]  90.68,90.68 90 top
R122  1K  [0603-RES]  93.22,90.68 90 top
R123  1K  [0603-RES]  95.76,90.68 90 top
R124  1K  [0603-RES]  106.43,90.68 90 top
R125  1K  [0603-RES]  108.97,90.68 90 top
R126  1K  [0603-RES]  111.51,90.68 90 top
R127  1K  [0603-RES]  11.94,106.43 90 top
R128  1K  [0603-RES]  14.48,106.43 90 top
R129  1K  [0603-RES]  17.02,106.43 90 top
R130  1K  [0603-RES]  27.69,106.43 90 top
R131  1K  [0603-RES]  30.23,106.43 90 top
R132  1K  [0603-RES]  32.77,106.43 90 top
R133  1K  [0603-RES]  43.43,106.43 90 top
R134  1K  [0603-RES]  45.97,106.43 90 top
R135  1K  [0603-RES]  48.51,106.43 90 top
R136  1K  [0603-RES]  59.18,106.43 90 top
R137  1K  [0603-RES]  61.72,106.43 90 top
R138  1K  [0603-RES]  64.26,106.43 90 top
R139  1K  [0603-RES]  74.93,106.43 90 top
R140  1K  [0603-RES]  77.47,106.43 90 top
R141  1K  [0603-RES]  80.01,106.43 90 top
R142  1K  [0603-RES]  90.68,106.43 90 top
R143  1K  [0603-RES]  93.22,106.43 90 top
R144  1K  [0603-RES]  95.76,106.43 90 top
R145  1K  [0603-RES]  106.43,106.43 90 top
R146  1K  [0603-RES]  108.97,106.43 90 top
R147  1K  [0603-RES]  111.51,106.43 90 top
U1  TMP1021:1  [SOT563-2]  14.48,15.75 180 top
U2  TMP1021:1  [SOT563-2]  30.23,15.75 180 top
U3  TMP1021:1  [SOT563-2]  45.97,15.75 180 top
U4  TMP1021:1  [SOT563-2]  61.72,15.75 180 top
U5  TMP1021:1  [SOT563-2]  77.47,15.75 180 top
U6  TMP1021:1  [SOT563-2]  93.22,15.75 180 top
U7  TMP1021:1  [SOT563-2]  108.97,15.75 180 top
U8  TMP1021:1  [SOT563-2]  14.48,31.5 180 top
U9  TMP1021:1  [SOT563-2]  30.23,31.5 180 top
U10  TMP1021:1  [SOT563-2]  45.97,31.5 180 top
U11  TMP1021:1  [SOT563-2]  61.72,31.5 180 top
U12  TMP1021:1  [SOT563-2]  77.47,31.5 180 top
U13  TMP1021:1  [SOT563-2]  93.22,31.5 180 top
U14  TMP1021:1  [SOT563-2]  108.97,31.5 180 top
U15  TMP1021:1  [SOT563-2]  14.48,47.24 180 top
U16  TMP1021:1  [SOT563-2]  30.23,47.24 180 top
U17  TMP1021:1  [SOT563-2]  45.97,47.24 180 top
U18  TMP1021:1  [SOT563-2]  61.72,47.24 180 top
U19  TMP1021:1  [SOT563-2]  77.47,47.24 180 top
U20  TMP1021:1  [SOT563-2]  93.22,47.24 180 top
U21  TMP1021:1  [SOT563-2]  108.97,47.24 180 top
U22  TMP1021:1  [SOT563-2]  14.48,62.99 180 top
U23  TMP1021:1  [SOT563-2]  30.23,62.99 180 top
U24  TMP1021:1  [SOT563-2]  45.97,62.99 180 top
U25  TMP1021:1  [SOT563-2]  61.72,62.99 180 top
U26  TMP1021:1  [SOT563-2]  77.47,62.99 180 top
U27  TMP1021:1  [SOT563-2]  93.22,62.99 180 top
U28  TMP1021:1  [SOT563-2]  108.97,62.99 180 top
U29  TMP1021:1  [SOT563-2]  14.48,78.74 180 top
U30  TMP1021:1  [SOT563-2]  30.23,78.74 180 top
U31  TMP1021:1  [SOT563-2]  45.97,78.74 180 top
U32  TMP1021:1  [SOT563-2]  61.72,78.74 180 top
U33  TMP1021:1  [SOT563-2]  77.47,78.74 180 top
U34  TMP1021:1  [SOT563-2]  93.22,78.74 180 top
U35  TMP1021:1  [SOT563-2]  108.97,78.74 180 top
U36  TMP1021:1  [SOT563-2]  14.48,94.49 180 top
U37  TMP1021:1  [SOT563-2]  30.23,94.49 180 top
U38  TMP1021:1  [SOT563-2]  45.97,94.49 180 top
U39  TMP1021:1  [SOT563-2]  61.72,94.49 180 top
U40  TMP1021:1  [SOT563-2]  77.47,94.49 180 top
U41  TMP1021:1  [SOT563-2]  93.22,94.49 180 top
U42  TMP1021:1  [SOT563-2]  108.97,94.49 180 top
U43  TMP1021:1  [SOT563-2]  14.48,110.24 180 top
U44  TMP1021:1  [SOT563-2]  30.23,110.24 180 top
U45  TMP1021:1  [SOT563-2]  45.97,110.24 180 top
U46  TMP1021:1  [SOT563-2]  61.72,110.24 180 top
U47  TMP1021:1  [SOT563-2]  77.47,110.24 180 top
U48  TMP1021:1  [SOT563-2]  93.22,110.24 180 top
U49  TMP1021:1  [SOT563-2]  108.97,110.24 180 top
U$1  [OSHW-LOGO-S]  14.48,15.75 0 bottom
U$2  [OSHW-LOGO-S]  30.23,15.75 0 bottom
U$3  [OSHW-LOGO-S]  45.97,15.75 0 bottom
U$4  [OSHW-LOGO-S]  61.72,15.75 0 bottom
U$5  [OSHW-LOGO-S]  77.47,15.75 0 bottom
U$6  [OSHW-LOGO-S]  93.22,15.75 0 bottom
U$7  [OSHW-LOGO-S]  108.97,15.75 0 bottom
U$8  [OSHW-LOGO-S]  14.48,31.5 0 bottom
U$9  [OSHW-LOGO-S]  30.23,31.5 0 bottom
U$10  [OSHW-LOGO-S]  45.97,31.5 0 bottom
U$11  [OSHW-LOGO-S]  61.72,31.5 0 bottom
U$12  [OSHW-LOGO-S]  77.47,31.5 0 bottom
U$13  [OSHW-LOGO-S]  93.22,31.5 0 bottom
U$14  [OSHW-LOGO-S]  108.97,31.5 0 bottom
U$15  [OSHW-LOGO-S]  14.48,47.24 0 bottom
U$16  [OSHW-LOGO-S]  30.23,47.24 0 bottom
U$17  [OSHW-LOGO-S]  45.97,47.24 0 bottom
U$18  [OSHW-LOGO-S]  61.72,47.24 0 bottom
U$19  [OSHW-LOGO-S]  77.47,47.24 0 bottom
U$20  [OSHW-LOGO-S]  93.22,47.24 0 bottom
U$21  [OSHW-LOGO-S]  108.97,47.24 0 bottom
U$22  [OSHW-LOGO-S]  14.48,62.99 0 bottom
U$23  [OSHW-LOGO-S]  30.23,62.99 0 bottom
U$24  [OSHW-LOGO-S]  45.97,62.99 0 bottom
U$25  [OSHW-LOGO-S]  61.72,62.99 0 bottom
U$26  [OSHW-LOGO-S]  77.47,62.99 0 bottom
U$27  [OSHW-LOGO-S]  93.22,62.99 0 bottom
U$28  [OSHW-LOGO-S]  108.97,62.99 0 bottom
U$29  [OSHW-LOGO-S]  14.48,78.74 0 bottom
U$30  [OSHW-LOGO-S]  30.23,78.74 0 bottom
U$31  [OSHW-LOGO-S]  45.97,78.74 0 bottom
U$32  [OSHW-LOGO-S]  61.72,78.74 0 bottom
U$33  [OSHW-LOGO-S]  77.47,78.74 0 bottom
U$34  [OSHW-LOGO-S]  93.22,78.74 0 bottom
U$35  [OSHW-LOGO-S]  108.97,78.74 0 bottom
U$36  [OSHW-LOGO-S]  14.48,94.49 0 bottom
U$37  [OSHW-LOGO-S]  30.23,94.49 0 bottom
U$38  [OSHW-LOGO-S]  45.97,94.49 0 bottom
U$39  [OSHW-LOGO-S]  61.72,94.49 0 bottom
U$40  [OSHW-LOGO-S]  77.47,94.49 0 bottom
U$41  [OSHW-LOGO-S]  93.22,94.49 0 bottom
U$42  [OSHW-LOGO-S]  108.97,94.49 0 bottom
U$43  [OSHW-LOGO-S]  14.48,110.24 0 bottom
U$44  [OSHW-LOGO-S]  30.23,110.24 0 bottom
U$45  [OSHW-LOGO-S]  45.97,110.24 0 bottom
U$46  [OSHW-LOGO-S]  61.72,110.24 0 bottom
U$47  [OSHW-LOGO-S]  77.47,110.24 0 bottom
U$48  [OSHW-LOGO-S]  93.22,110.24 0 bottom
U$49  [OSHW-LOGO-S]  108.97,110.24 0 bottom

## Library data of the parts
C1-C49 JP1-JP343 R1-R147 U$1-U$49 = SparkFun
E$1 E$4 E$5 = SparkFun-Aesthetics
U1-U49 = SparkFun-Sensors

## Nets
ADD0: JP1.6 JP2.2 U1.4
ADD1: JP11.6 JP12.2 U2.4
ADD2: JP18.6 JP19.2 U3.4
ADD3: JP25.6 JP26.2 U4.4
ADD4: JP32.6 JP33.2 U5.4
ADD5: JP39.6 JP40.2 U6.4
ADD6: JP46.6 JP47.2 U7.4
ADD7: JP53.6 JP54.2 U8.4
ADD8: JP60.6 JP61.2 U9.4
ADD9: JP67.6 JP68.2 U10.4
ADD10: JP74.6 JP75.2 U11.4
ADD11: JP81.6 JP82.2 U12.4
ADD12: JP88.6 JP89.2 U13.4
ADD13: JP95.6 JP96.2 U14.4
ADD14: JP102.6 JP103.2 U15.4
ADD15: JP109.6 JP110.2 U16.4
ADD16: JP116.6 JP117.2 U17.4
ADD17: JP123.6 JP124.2 U18.4
ADD18: JP130.6 JP131.2 U19.4
ADD19: JP137.6 JP138.2 U20.4
ADD20: JP144.6 JP145.2 U21.4
ADD21: JP151.6 JP152.2 U22.4
ADD22: JP158.6 JP159.2 U23.4
ADD23: JP165.6 JP166.2 U24.4
ADD24: JP172.6 JP173.2 U25.4
ADD25: JP179.6 JP180.2 U26.4
ADD26: JP186.6 JP187.2 U27.4
ADD27: JP193.6 JP194.2 U28.4
ADD28: JP200.6 JP201.2 U29.4
ADD29: JP207.6 JP208.2 U30.4
ADD30: JP214.6 JP215.2 U31.4
ADD31: JP221.6 JP222.2 U32.4
ADD32: JP228.6 JP229.2 U33.4
ADD33: JP235.6 JP236.2 U34.4
ADD34: JP242.6 JP243.2 U35.4
ADD35: JP249.6 JP250.2 U36.4
ADD36: JP256.6 JP257.2 U37.4
ADD37: JP263.6 JP264.2 U38.4
ADD38: JP270.6 JP271.2 U39.4
ADD39: JP277.6 JP278.2 U40.4
ADD40: JP284.6 JP285.2 U41.4
ADD41: JP291.6 JP292.2 U42.4
ADD42: JP298.6 JP299.2 U43.4
ADD43: JP305.6 JP306.2 U44.4
ADD44: JP312.6 JP313.2 U45.4
ADD45: JP319.6 JP320.2 U46.4
ADD46: JP326.6 JP327.2 U47.4
ADD47: JP333.6 JP334.2 U48.4
ADD48: JP340.6 JP341.2 U49.4
ALERT: JP1.5 R3.1 U1.3
ALERT1: JP11.5 R6.1 U2.3
ALERT2: JP18.5 R9.1 U3.3
ALERT3: JP25.5 R12.1 U4.3
ALERT4: JP32.5 R15.1 U5.3
ALERT5: JP39.5 R18.1 U6.3
ALERT6: JP46.5 R21.1 U7.3
ALERT7: JP53.5 R24.1 U8.3
ALERT8: JP60.5 R27.1 U9.3
ALERT9: JP67.5 R30.1 U10.3
ALERT10: JP74.5 R33.1 U11.3
ALERT11: JP81.5 R36.1 U12.3
ALERT12: JP88.5 R39.1 U13.3
ALERT13: JP95.5 R42.1 U14.3
ALERT14: JP102.5 R45.1 U15.3
ALERT15: JP109.5 R48.1 U16.3
ALERT16: JP116.5 R51.1 U17.3
ALERT17: JP123.5 R54.1 U18.3
ALERT18: JP130.5 R57.1 U19.3
ALERT19: JP137.5 R60.1 U20.3
ALERT20: JP144.5 R63.1 U21.3
ALERT21: JP151.5 R66.1 U22.3
ALERT22: JP158.5 R69.1 U23.3
ALERT23: JP165.5 R72.1 U24.3
ALERT24: JP172.5 R75.1 U25.3
ALERT25: JP179.5 R78.1 U26.3
ALERT26: JP186.5 R81.1 U27.3
ALERT27: JP193.5 R84.1 U28.3
ALERT28: JP200.5 R87.1 U29.3
ALERT29: JP207.5 R90.1 U30.3
ALERT30: JP214.5 R93.1 U31.3
ALERT31: JP221.5 R96.1 U32.3
ALERT32: JP228.5 R99.1 U33.3
ALERT33: JP235.5 R102.1 U34.3
ALERT34: JP242.5 R105.1 U35.3
ALERT35: JP249.5 R108.1 U36.3
ALERT36: JP256.5 R111.1 U37.3
ALERT37: JP263.5 R114.1 U38.3
ALERT38: JP270.5 R117.1 U39.3
ALERT39: JP277.5 R120.1 U40.3
ALERT40: JP284.5 R123.1 U41.3
ALERT41: JP291.5 R126.1 U42.3
ALERT42: JP298.5 R129.1 U43.3
ALERT43: JP305.5 R132.1 U44.3
ALERT44: JP312.5 R135.1 U45.3
ALERT45: JP319.5 R138.1 U46.3
ALERT46: JP326.5 R141.1 U47.3
ALERT47: JP333.5 R144.1 U48.3
ALERT48: JP340.5 R147.1 U49.3
GND: C1.2 JP1.2 JP2.3 U1.2
GND1: C2.2 JP11.2 JP12.3 U2.2
GND2: C3.2 JP18.2 JP19.3 U3.2
GND3: C4.2 JP25.2 JP26.3 U4.2
GND4: C5.2 JP32.2 JP33.3 U5.2
GND5: C6.2 JP39.2 JP40.3 U6.2
GND6: C7.2 JP46.2 JP47.3 U7.2
GND7: C8.2 JP53.2 JP54.3 U8.2
GND8: C9.2 JP60.2 JP61.3 U9.2
GND9: C10.2 JP67.2 JP68.3 U10.2
GND10: C11.2 JP74.2 JP75.3 U11.2
GND11: C12.2 JP81.2 JP82.3 U12.2
GND12: C13.2 JP88.2 JP89.3 U13.2
GND13: C14.2 JP95.2 JP96.3 U14.2
GND14: C15.2 JP102.2 JP103.3 U15.2
GND15: C16.2 JP109.2 JP110.3 U16.2
GND16: C17.2 JP116.2 JP117.3 U17.2
GND17: C18.2 JP123.2 JP124.3 U18.2
GND18: C19.2 JP130.2 JP131.3 U19.2
GND19: C20.2 JP137.2 JP138.3 U20.2
GND20: C21.2 JP144.2 JP145.3 U21.2
GND21: C22.2 JP151.2 JP152.3 U22.2
GND22: C23.2 JP158.2 JP159.3 U23.2
GND23: C24.2 JP165.2 JP166.3 U24.2
GND24: C25.2 JP172.2 JP173.3 U25.2
GND25: C26.2 JP179.2 JP180.3 U26.2
GND26: C27.2 JP186.2 JP187.3 U27.2
GND27: C28.2 JP193.2 JP194.3 U28.2
GND28: C29.2 JP200.2 JP201.3 U29.2
GND29: C30.2 JP207.2 JP208.3 U30.2
GND30: C31.2 JP214.2 JP215.3 U31.2
GND31: C32.2 JP221.2 JP222.3 U32.2
GND32: C33.2 JP228.2 JP229.3 U33.2
GND33: C34.2 JP235.2 JP236.3 U34.2
GND34: C35.2 JP242.2 JP243.3 U35.2
GND35: C36.2 JP249.2 JP250.3 U36.2
GND36: C37.2 JP256.2 JP257.3 U37.2
GND37: C38.2 JP263.2 JP264.3 U38.2
GND38: C39.2 JP270.2 JP271.3 U39.2
GND39: C40.2 JP277.2 JP278.3 U40.2
GND40: C41.2 JP284.2 JP285.3 U41.2
GND41: C42.2 JP291.2 JP292.3 U42.2
GND42: C43.2 JP298.2 JP299.3 U43.2
GND43: C44.2 JP305.2 JP306.3 U44.2
GND44: C45.2 JP312.2 JP313.3 U45.2
GND45: C46.2 JP319.2 JP320.3 U46.2
GND46: C47.2 JP326.2 JP327.3 U47.2
GND47: C48.2 JP333.2 JP334.3 U48.2
GND48: C49.2 JP340.2 JP341.3 U49.2
SCL: JP1.4 R2.1 U1.1
SCL1: JP11.4 R5.1 U2.1
SCL2: JP18.4 R8.1 U3.1
SCL3: JP25.4 R11.1 U4.1
SCL4: JP32.4 R14.1 U5.1
SCL5: JP39.4 R17.1 U6.1
SCL6: JP46.4 R20.1 U7.1
SCL7: JP53.4 R23.1 U8.1
SCL8: JP60.4 R26.1 U9.1
SCL9: JP67.4 R29.1 U10.1
SCL10: JP74.4 R32.1 U11.1
SCL11: JP81.4 R35.1 U12.1
SCL12: JP88.4 R38.1 U13.1
SCL13: JP95.4 R41.1 U14.1
SCL14: JP102.4 R44.1 U15.1
SCL15: JP109.4 R47.1 U16.1
SCL16: JP116.4 R50.1 U17.1
SCL17: JP123.4 R53.1 U18.1
SCL18: JP130.4 R56.1 U19.1
SCL19: JP137.4 R59.1 U20.1
SCL20: JP144.4 R62.1 U21.1
SCL21: JP151.4 R65.1 U22.1
SCL22: JP158.4 R68.1 U23.1
SCL23: JP165.4 R71.1 U24.1
SCL24: JP172.4 R74.1 U25.1
SCL25: JP179.4 R77.1 U26.1
SCL26: JP186.4 R80.1 U27.1
SCL27: JP193.4 R83.1 U28.1
SCL28: JP200.4 R86.1 U29.1
SCL29: JP207.4 R89.1 U30.1
SCL30: JP214.4 R92.1 U31.1
SCL31: JP221.4 R95.1 U32.1
SCL32: JP228.4 R98.1 U33.1
SCL33: JP235.4 R101.1 U34.1
SCL34: JP242.4 R104.1 U35.1
SCL35: JP249.4 R107.1 U36.1
SCL36: JP256.4 R110.1 U37.1
SCL37: JP263.4 R113.1 U38.1
SCL38: JP270.4 R116.1 U39.1
SCL39: JP277.4 R119.1 U40.1
SCL40: JP284.4 R122.1 U41.1
SCL41: JP291.4 R125.1 U42.1
SCL42: JP298.4 R128.1 U43.1
SCL43: JP305.4 R131.1 U44.1
SCL44: JP312.4 R134.1 U45.1
SCL45: JP319.4 R137.1 U46.1
SCL46: JP326.4 R140.1 U47.1
SCL47: JP333.4 R143.1 U48.1
SCL48: JP340.4 R146.1 U49.1
SDA: JP1.3 R1.1 U1.6
SDA1: JP11.3 R4.1 U2.6
SDA2: JP18.3 R7.1 U3.6
SDA3: JP25.3 R10.1 U4.6
SDA4: JP32.3 R13.1 U5.6
SDA5: JP39.3 R16.1 U6.6
SDA6: JP46.3 R19.1 U7.6
SDA7: JP53.3 R22.1 U8.6
SDA8: JP60.3 R25.1 U9.6
SDA9: JP67.3 R28.1 U10.6
SDA10: JP74.3 R31.1 U11.6
SDA11: JP81.3 R34.1 U12.6
SDA12: JP88.3 R37.1 U13.6
SDA13: JP95.3 R40.1 U14.6
SDA14: JP102.3 R43.1 U15.6
SDA15: JP109.3 R46.1 U16.6
SDA16: JP116.3 R49.1 U17.6
SDA17: JP123.3 R52.1 U18.6
SDA18: JP130.3 R55.1 U19.6
SDA19: JP137.3 R58.1 U20.6
SDA20: JP144.3 R61.1 U21.6
SDA21: JP151.3 R64.1 U22.6
SDA22: JP158.3 R67.1 U23.6
SDA23: JP165.3 R70.1 U24.6
SDA24: JP172.3 R73.1 U25.6
SDA25: JP179.3 R76.1 U26.6
SDA26: JP186.3 R79.1 U27.6
SDA27: JP193.3 R82.1 U28.6
SDA28: JP200.3 R85.1 U29.6
SDA29: JP207.3 R88.1 U30.6
SDA30: JP214.3 R91.1 U31.6
SDA31: JP221.3 R94.1 U32.6
SDA32: JP228.3 R97.1 U33.6
SDA33: JP235.3 R100.1 U34.6
SDA34: JP242.3 R103.1 U35.6
SDA35: JP249.3 R106.1 U36.6
SDA36: JP256.3 R109.1 U37.6
SDA37: JP263.3 R112.1 U38.6
SDA38: JP270.3 R115.1 U39.6
SDA39: JP277.3 R118.1 U40.6
SDA40: JP284.3 R121.1 U41.6
SDA41: JP291.3 R124.1 U42.6
SDA42: JP298.3 R127.1 U43.6
SDA43: JP305.3 R130.1 U44.6
SDA44: JP312.3 R133.1 U45.6
SDA45: JP319.3 R136.1 U46.6
SDA46: JP326.3 R139.1 U47.6
SDA47: JP333.3 R142.1 U48.6
SDA48: JP340.3 R145.1 U49.6
VCC: C1.1 JP1.1 JP2.1 R1.2 R2.2 R3.2 U1.5
VCC1: C2.1 JP11.1 JP12.1 R4.2 R5.2 R6.2 U2.5
VCC2: C3.1 JP18.1 JP19.1 R7.2 R8.2 R9.2 U3.5
VCC3: C4.1 JP25.1 JP26.1 R10.2 R11.2 R12.2 U4.5
VCC4: C5.1 JP32.1 JP33.1 R13.2 R14.2 R15.2 U5.5
VCC5: C6.1 JP39.1 JP40.1 R16.2 R17.2 R18.2 U6.5
VCC6: C7.1 JP46.1 JP47.1 R19.2 R20.2 R21.2 U7.5
VCC7: C8.1 JP53.1 JP54.1 R22.2 R23.2 R24.2 U8.5
VCC8: C9.1 JP60.1 JP61.1 R25.2 R26.2 R27.2 U9.5
VCC9: C10.1 JP67.1 JP68.1 R28.2 R29.2 R30.2 U10.5
VCC10: C11.1 JP74.1 JP75.1 R31.2 R32.2 R33.2 U11.5
VCC11: C12.1 JP81.1 JP82.1 R34.2 R35.2 R36.2 U12.5
VCC12: C13.1 JP88.1 JP89.1 R37.2 R38.2 R39.2 U13.5
VCC13: C14.1 JP95.1 JP96.1 R40.2 R41.2 R42.2 U14.5
VCC14: C15.1 JP102.1 JP103.1 R43.2 R44.2 R45.2 U15.5
VCC15: C16.1 JP109.1 JP110.1 R46.2 R47.2 R48.2 U16.5
VCC16: C17.1 JP116.1 JP117.1 R49.2 R50.2 R51.2 U17.5
VCC17: C18.1 JP123.1 JP124.1 R52.2 R53.2 R54.2 U18.5
VCC18: C19.1 JP130.1 JP131.1 R55.2 R56.2 R57.2 U19.5
VCC19: C20.1 JP137.1 JP138.1 R58.2 R59.2 R60.2 U20.5
VCC20: C21.1 JP144.1 JP145.1 R61.2 R62.2 R63.2 U21.5
VCC21: C22.1 JP151.1 JP152.1 R64.2 R65.2 R66.2 U22.5
VCC22: C23.1 JP158.1 JP159.1 R67.2 R68.2 R69.2 U23.5
VCC23: C24.1 JP165.1 JP166.1 R70.2 R71.2 R72.2 U24.5
VCC24: C25.1 JP172.1 JP173.1 R73.2 R74.2 R75.2 U25.5
VCC25: C26.1 JP179.1 JP180.1 R76.2 R77.2 R78.2 U26.5
VCC26: C27.1 JP186.1 JP187.1 R79.2 R80.2 R81.2 U27.5
VCC27: C28.1 JP193.1 JP194.1 R82.2 R83.2 R84.2 U28.5
VCC28: C29.1 JP200.1 JP201.1 R85.2 R86.2 R87.2 U29.5
VCC29: C30.1 JP207.1 JP208.1 R88.2 R89.2 R90.2 U30.5
VCC30: C31.1 JP214.1 JP215.1 R91.2 R92.2 R93.2 U31.5
VCC31: C32.1 JP221.1 JP222.1 R94.2 R95.2 R96.2 U32.5
VCC32: C33.1 JP228.1 JP229.1 R97.2 R98.2 R99.2 U33.5
VCC33: C34.1 JP235.1 JP236.1 R100.2 R101.2 R102.2 U34.5
VCC34: C35.1 JP242.1 JP243.1 R103.2 R104.2 R105.2 U35.5
VCC35: C36.1 JP249.1 JP250.1 R106.2 R107.2 R108.2 U36.5
VCC36: C37.1 JP256.1 JP257.1 R109.2 R110.2 R111.2 U37.5
VCC37: C38.1 JP263.1 JP264.1 R112.2 R113.2 R114.2 U38.5
VCC38: C39.1 JP270.1 JP271.1 R115.2 R116.2 R117.2 U39.5
VCC39: C40.1 JP277.1 JP278.1 R118.2 R119.2 R120.2 U40.5
VCC40: C41.1 JP284.1 JP285.1 R121.2 R122.2 R123.2 U41.5
VCC41: C42.1 JP291.1 JP292.1 R124.2 R125.2 R126.2 U42.5
VCC42: C43.1 JP298.1 JP299.1 R127.2 R128.2 R129.2 U43.5
VCC43: C44.1 JP305.1 JP306.1 R130.2 R131.2 R132.2 U44.5
VCC44: C45.1 JP312.1 JP313.1 R133.2 R134.2 R135.2 U45.5
VCC45: C46.1 JP319.1 JP320.1 R136.2 R137.2 R138.2 U46.5
VCC46: C47.1 JP326.1 JP327.1 R139.2 R140.2 R141.2 U47.5
VCC47: C48.1 JP333.1 JP334.1 R142.2 R143.2 R144.2 U48.5
VCC48: C49.1 JP340.1 JP341.1 R145.2 R146.2 R147.2 U49.5

## Tracks (layer width: path | path; a pad name or v marks a point on that pad's centre or on a via)
ADD0  (via drill 0.51)
  Top 0.203: JP1.6 19.56,9.4 v19.56,11.94 JP2.2 | U1.4 12.7,16.25 v11.94,17.02
  Bottom 0.203: v11.94,17.02 13.21,17.02 14.48,15.75 18.29,15.75 JP2.2 v19.56,11.94
ADD1  (via drill 0.51)
  Top 0.203: JP11.6 35.31,9.4 v35.31,11.94 JP12.2 | U2.4 28.45,16.25 v27.69,17.02
  Bottom 0.203: v27.69,17.02 28.96,17.02 30.23,15.75 34.04,15.75 JP12.2 v35.31,11.94
ADD2  (via drill 0.51)
  Top 0.203: JP18.6 51.05,9.4 v51.05,11.94 JP19.2 | U3.4 44.2,16.25 v43.43,17.02
  Bottom 0.203: v43.43,17.02 44.7,17.02 45.97,15.75 49.78,15.75 JP19.2 v51.05,11.94
ADD3  (via drill 0.51)
  Top 0.203: JP25.6 66.8,9.4 v66.8,11.94 JP26.2 | U4.4 59.95,16.25 v59.18,17.02
  Bottom 0.203: v59.18,17.02 60.45,17.02 61.72,15.75 65.53,15.75 JP26.2 v66.8,11.94
ADD4  (via drill 0.51)
  Top 0.203: JP32.6 82.55,9.4 v82.55,11.94 JP33.2 | U5.4 75.69,16.25 v74.93,17.02
  Bottom 0.203: v74.93,17.02 76.2,17.02 77.47,15.75 81.28,15.75 JP33.2 v82.55,11.94
ADD5  (via drill 0.51)
  Top 0.203: JP39.6 98.3,9.4 v98.3,11.94 JP40.2 | U6.4 91.44,16.25 v90.68,17.02
  Bottom 0.203: v90.68,17.02 91.95,17.02 93.22,15.75 97.03,15.75 JP40.2 v98.3,11.94
ADD6  (via drill 0.51)
  Top 0.203: JP46.6 114.05,9.4 v114.05,11.94 JP47.2 | U7.4 107.19,16.25 v106.43,17.02
  Bottom 0.203: v106.43,17.02 107.7,17.02 108.97,15.75 112.78,15.75 JP47.2 v114.05,11.94
ADD7  (via drill 0.51)
  Top 0.203: JP53.6 19.56,25.15 v19.56,27.69 JP54.2 | U8.4 12.7,32 v11.94,32.77
  Bottom 0.203: v11.94,32.77 13.21,32.77 14.48,31.5 18.29,31.5 JP54.2 v19.56,27.69
ADD8  (via drill 0.51)
  Top 0.203: JP60.6 35.31,25.15 v35.31,27.69 JP61.2 | U9.4 28.45,32 v27.69,32.77
  Bottom 0.203: v27.69,32.77 28.96,32.77 30.23,31.5 34.04,31.5 JP61.2 v35.31,27.69
ADD9  (via drill 0.51)
  Top 0.203: JP67.6 51.05,25.15 v51.05,27.69 JP68.2 | U10.4 44.2,32 v43.43,32.77
  Bottom 0.203: v43.43,32.77 44.7,32.77 45.97,31.5 49.78,31.5 JP68.2 v51.05,27.69
ADD10  (via drill 0.51)
  Top 0.203: JP74.6 66.8,25.15 v66.8,27.69 JP75.2 | U11.4 59.95,32 v59.18,32.77
  Bottom 0.203: v59.18,32.77 60.45,32.77 61.72,31.5 65.53,31.5 JP75.2 v66.8,27.69
ADD11  (via drill 0.51)
  Top 0.203: JP81.6 82.55,25.15 v82.55,27.69 JP82.2 | U12.4 75.69,32 v74.93,32.77
  Bottom 0.203: v74.93,32.77 76.2,32.77 77.47,31.5 81.28,31.5 JP82.2 v82.55,27.69
ADD12  (via drill 0.51)
  Top 0.203: JP88.6 98.3,25.15 v98.3,27.69 JP89.2 | U13.4 91.44,32 v90.68,32.77
  Bottom 0.203: v90.68,32.77 91.95,32.77 93.22,31.5 97.03,31.5 JP89.2 v98.3,27.69
ADD13  (via drill 0.51)
  Top 0.203: JP95.6 114.05,25.15 v114.05,27.69 JP96.2 | U14.4 107.19,32 v106.43,32.77
  Bottom 0.203: v106.43,32.77 107.7,32.77 108.97,31.5 112.78,31.5 JP96.2 v114.05,27.69
ADD14  (via drill 0.51)
  Top 0.203: JP102.6 19.56,40.89 v19.56,43.43 JP103.2 | U15.4 12.7,47.75 v11.94,48.51
  Bottom 0.203: v11.94,48.51 13.21,48.51 14.48,47.24 18.29,47.24 JP103.2 v19.56,43.43
ADD15  (via drill 0.51)
  Top 0.203: JP109.6 35.31,40.89 v35.31,43.43 JP110.2 | U16.4 28.45,47.75 v27.69,48.51
  Bottom 0.203: v27.69,48.51 28.96,48.51 30.23,47.24 34.04,47.24 JP110.2 v35.31,43.43
ADD16  (via drill 0.51)
  Top 0.203: JP116.6 51.05,40.89 v51.05,43.43 JP117.2 | U17.4 44.2,47.75 v43.43,48.51
  Bottom 0.203: v43.43,48.51 44.7,48.51 45.97,47.24 49.78,47.24 JP117.2 v51.05,43.43
ADD17  (via drill 0.51)
  Top 0.203: JP123.6 66.8,40.89 v66.8,43.43 JP124.2 | U18.4 59.95,47.75 v59.18,48.51
  Bottom 0.203: v59.18,48.51 60.45,48.51 61.72,47.24 65.53,47.24 JP124.2 v66.8,43.43
ADD18  (via drill 0.51)
  Top 0.203: JP130.6 82.55,40.89 v82.55,43.43 JP131.2 | U19.4 75.69,47.75 v74.93,48.51
  Bottom 0.203: v74.93,48.51 76.2,48.51 77.47,47.24 81.28,47.24 JP131.2 v82.55,43.43
ADD19  (via drill 0.51)
  Top 0.203: JP137.6 98.3,40.89 v98.3,43.43 JP138.2 | U20.4 91.44,47.75 v90.68,48.51
  Bottom 0.203: v90.68,48.51 91.95,48.51 93.22,47.24 97.03,47.24 JP138.2 v98.3,43.43
ADD20  (via drill 0.51)
  Top 0.203: JP144.6 114.05,40.89 v114.05,43.43 JP145.2 | U21.4 107.19,47.75 v106.43,48.51
  Bottom 0.203: v106.43,48.51 107.7,48.51 108.97,47.24 112.78,47.24 JP145.2 v114.05,43.43
ADD21  (via drill 0.51)
  Top 0.203: JP151.6 19.56,56.64 v19.56,59.18 JP152.2 | U22.4 12.7,63.5 v11.94,64.26
  Bottom 0.203: v11.94,64.26 13.21,64.26 14.48,62.99 18.29,62.99 JP152.2 v19.56,59.18
ADD22  (via drill 0.51)
  Top 0.203: JP158.6 35.31,56.64 v35.31,59.18 JP159.2 | U23.4 28.45,63.5 v27.69,64.26
  Bottom 0.203: v27.69,64.26 28.96,64.26 30.23,62.99 34.04,62.99 JP159.2 v35.31,59.18
ADD23  (via drill 0.51)
  Top 0.203: JP165.6 51.05,56.64 v51.05,59.18 JP166.2 | U24.4 44.2,63.5 v43.43,64.26
  Bottom 0.203: v43.43,64.26 44.7,64.26 45.97,62.99 49.78,62.99 JP166.2 v51.05,59.18
ADD24  (via drill 0.51)
  Top 0.203: JP172.6 66.8,56.64 v66.8,59.18 JP173.2 | U25.4 59.95,63.5 v59.18,64.26
  Bottom 0.203: v59.18,64.26 60.45,64.26 61.72,62.99 65.53,62.99 JP173.2 v66.8,59.18
ADD25  (via drill 0.51)
  Top 0.203: JP179.6 82.55,56.64 v82.55,59.18 JP180.2 | U26.4 75.69,63.5 v74.93,64.26
  Bottom 0.203: v74.93,64.26 76.2,64.26 77.47,62.99 81.28,62.99 JP180.2 v82.55,59.18
ADD26  (via drill 0.51)
  Top 0.203: JP186.6 98.3,56.64 v98.3,59.18 JP187.2 | U27.4 91.44,63.5 v90.68,64.26
  Bottom 0.203: v90.68,64.26 91.95,64.26 93.22,62.99 97.03,62.99 JP187.2 v98.3,59.18
ADD27  (via drill 0.51)
  Top 0.203: JP193.6 114.05,56.64 v114.05,59.18 JP194.2 | U28.4 107.19,63.5 v106.43,64.26
  Bottom 0.203: v106.43,64.26 107.7,64.26 108.97,62.99 112.78,62.99 JP194.2 v114.05,59.18
ADD28  (via drill 0.51)
  Top 0.203: JP200.6 19.56,72.39 v19.56,74.93 JP201.2 | U29.4 12.7,79.25 v11.94,80.01
  Bottom 0.203: v11.94,80.01 13.21,80.01 14.48,78.74 18.29,78.74 JP201.2 v19.56,74.93
ADD29  (via drill 0.51)
  Top 0.203: JP207.6 35.31,72.39 v35.31,74.93 JP208.2 | U30.4 28.45,79.25 v27.69,80.01
  Bottom 0.203: v27.69,80.01 28.96,80.01 30.23,78.74 34.04,78.74 JP208.2 v35.31,74.93
ADD30  (via drill 0.51)
  Top 0.203: JP214.6 51.05,72.39 v51.05,74.93 JP215.2 | U31.4 44.2,79.25 v43.43,80.01
  Bottom 0.203: v43.43,80.01 44.7,80.01 45.97,78.74 49.78,78.74 JP215.2 v51.05,74.93
ADD31  (via drill 0.51)
  Top 0.203: JP221.6 66.8,72.39 v66.8,74.93 JP222.2 | U32.4 59.95,79.25 v59.18,80.01
  Bottom 0.203: v59.18,80.01 60.45,80.01 61.72,78.74 65.53,78.74 JP222.2 v66.8,74.93
ADD32  (via drill 0.51)
  Top 0.203: JP228.6 82.55,72.39 v82.55,74.93 JP229.2 | U33.4 75.69,79.25 v74.93,80.01
  Bottom 0.203: v74.93,80.01 76.2,80.01 77.47,78.74 81.28,78.74 JP229.2 v82.55,74.93
ADD33  (via drill 0.51)
  Top 0.203: JP235.6 98.3,72.39 v98.3,74.93 JP236.2 | U34.4 91.44,79.25 v90.68,80.01
  Bottom 0.203: v90.68,80.01 91.95,80.01 93.22,78.74 97.03,78.74 JP236.2 v98.3,74.93
ADD34  (via drill 0.51)
  Top 0.203: JP242.6 114.05,72.39 v114.05,74.93 JP243.2 | U35.4 107.19,79.25 v106.43,80.01
  Bottom 0.203: v106.43,80.01 107.7,80.01 108.97,78.74 112.78,78.74 JP243.2 v114.05,74.93
ADD35  (via drill 0.51)
  Top 0.203: JP249.6 19.56,88.14 v19.56,90.68 JP250.2 | U36.4 12.7,94.99 v11.94,95.76
  Bottom 0.203: v11.94,95.76 13.21,95.76 14.48,94.49 18.29,94.49 JP250.2 v19.56,90.68
ADD36  (via drill 0.51)
  Top 0.203: JP256.6 35.31,88.14 v35.31,90.68 JP257.2 | U37.4 28.45,94.99 v27.69,95.76
  Bottom 0.203: v27.69,95.76 28.96,95.76 30.23,94.49 34.04,94.49 JP257.2 v35.31,90.68
ADD37  (via drill 0.51)
  Top 0.203: JP263.6 51.05,88.14 v51.05,90.68 JP264.2 | U38.4 44.2,94.99 v43.43,95.76
  Bottom 0.203: v43.43,95.76 44.7,95.76 45.97,94.49 49.78,94.49 JP264.2 v51.05,90.68
ADD38  (via drill 0.51)
  Top 0.203: JP270.6 66.8,88.14 v66.8,90.68 JP271.2 | U39.4 59.95,94.99 v59.18,95.76
  Bottom 0.203: v59.18,95.76 60.45,95.76 61.72,94.49 65.53,94.49 JP271.2 v66.8,90.68
ADD39  (via drill 0.51)
  Top 0.203: JP277.6 82.55,88.14 v82.55,90.68 JP278.2 | U40.4 75.69,94.99 v74.93,95.76
  Bottom 0.203: v74.93,95.76 76.2,95.76 77.47,94.49 81.28,94.49 JP278.2 v82.55,90.68
ADD40  (via drill 0.51)
  Top 0.203: JP284.6 98.3,88.14 v98.3,90.68 JP285.2 | U41.4 91.44,94.99 v90.68,95.76